# EAGLE board working (EAGLE 7.7.0)
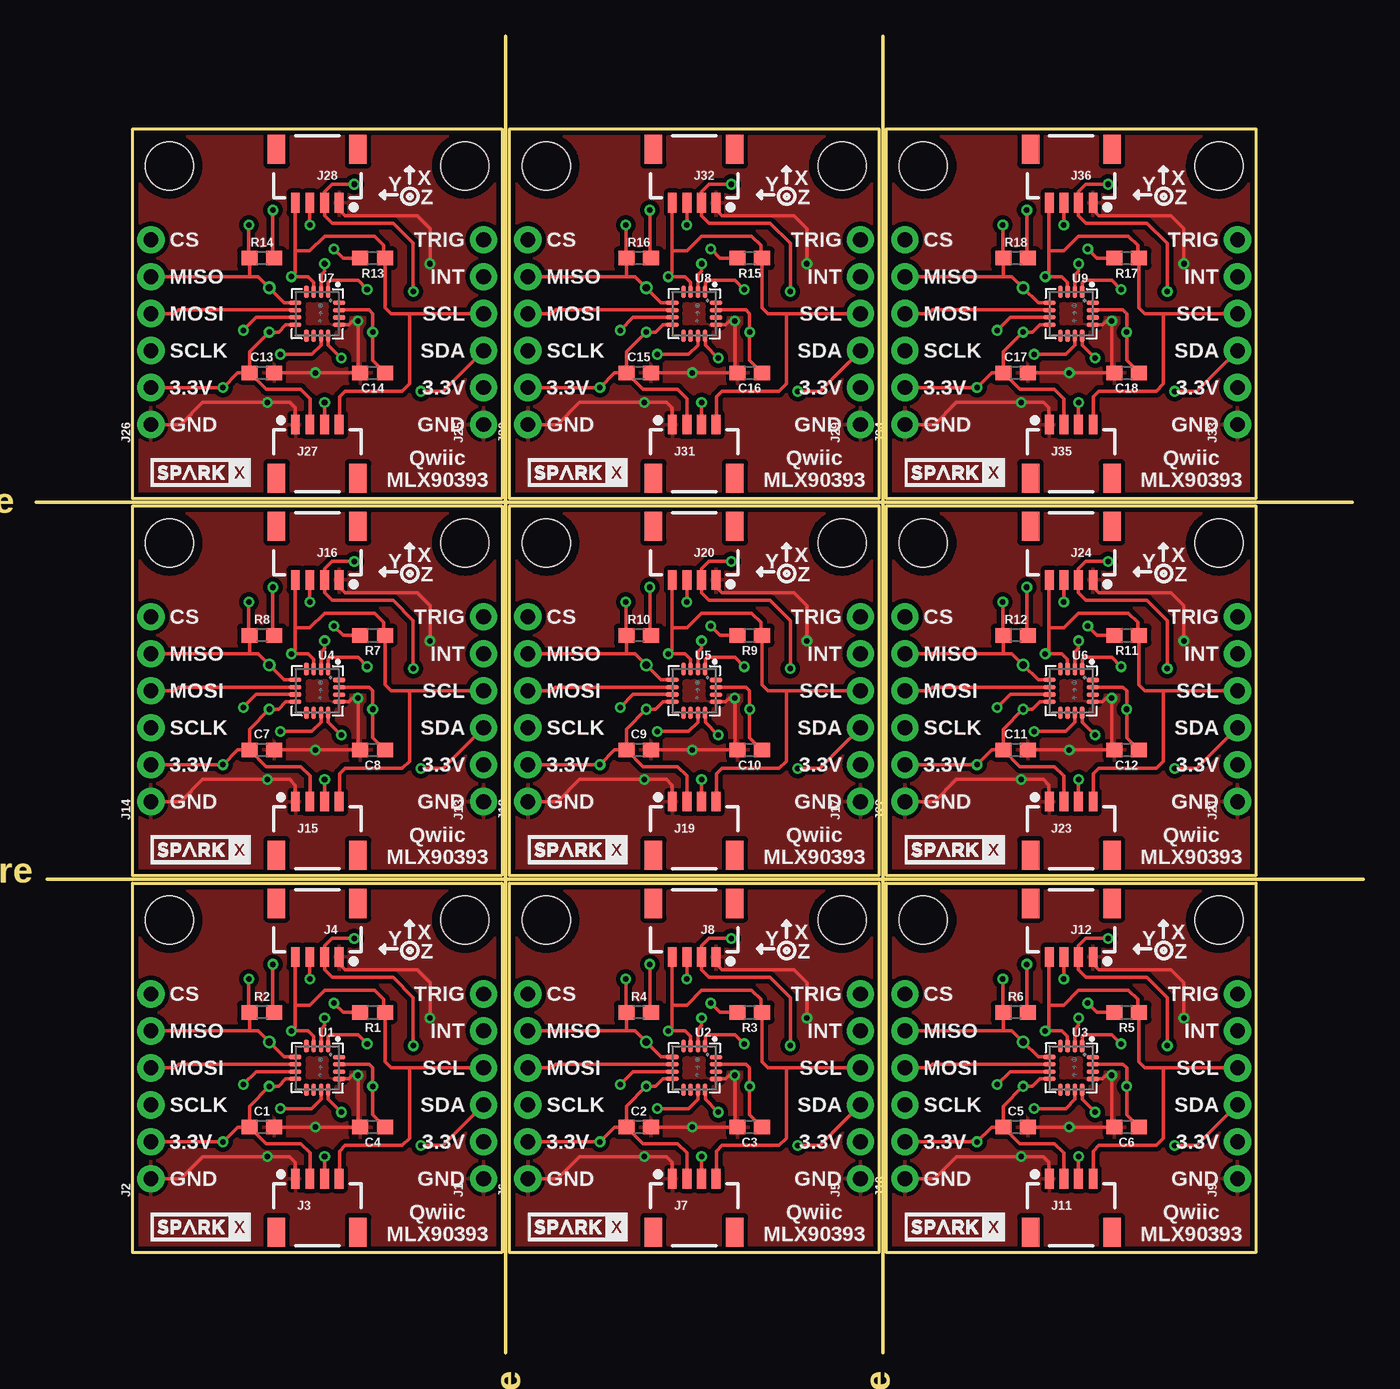
[diagram p0: board, top side]
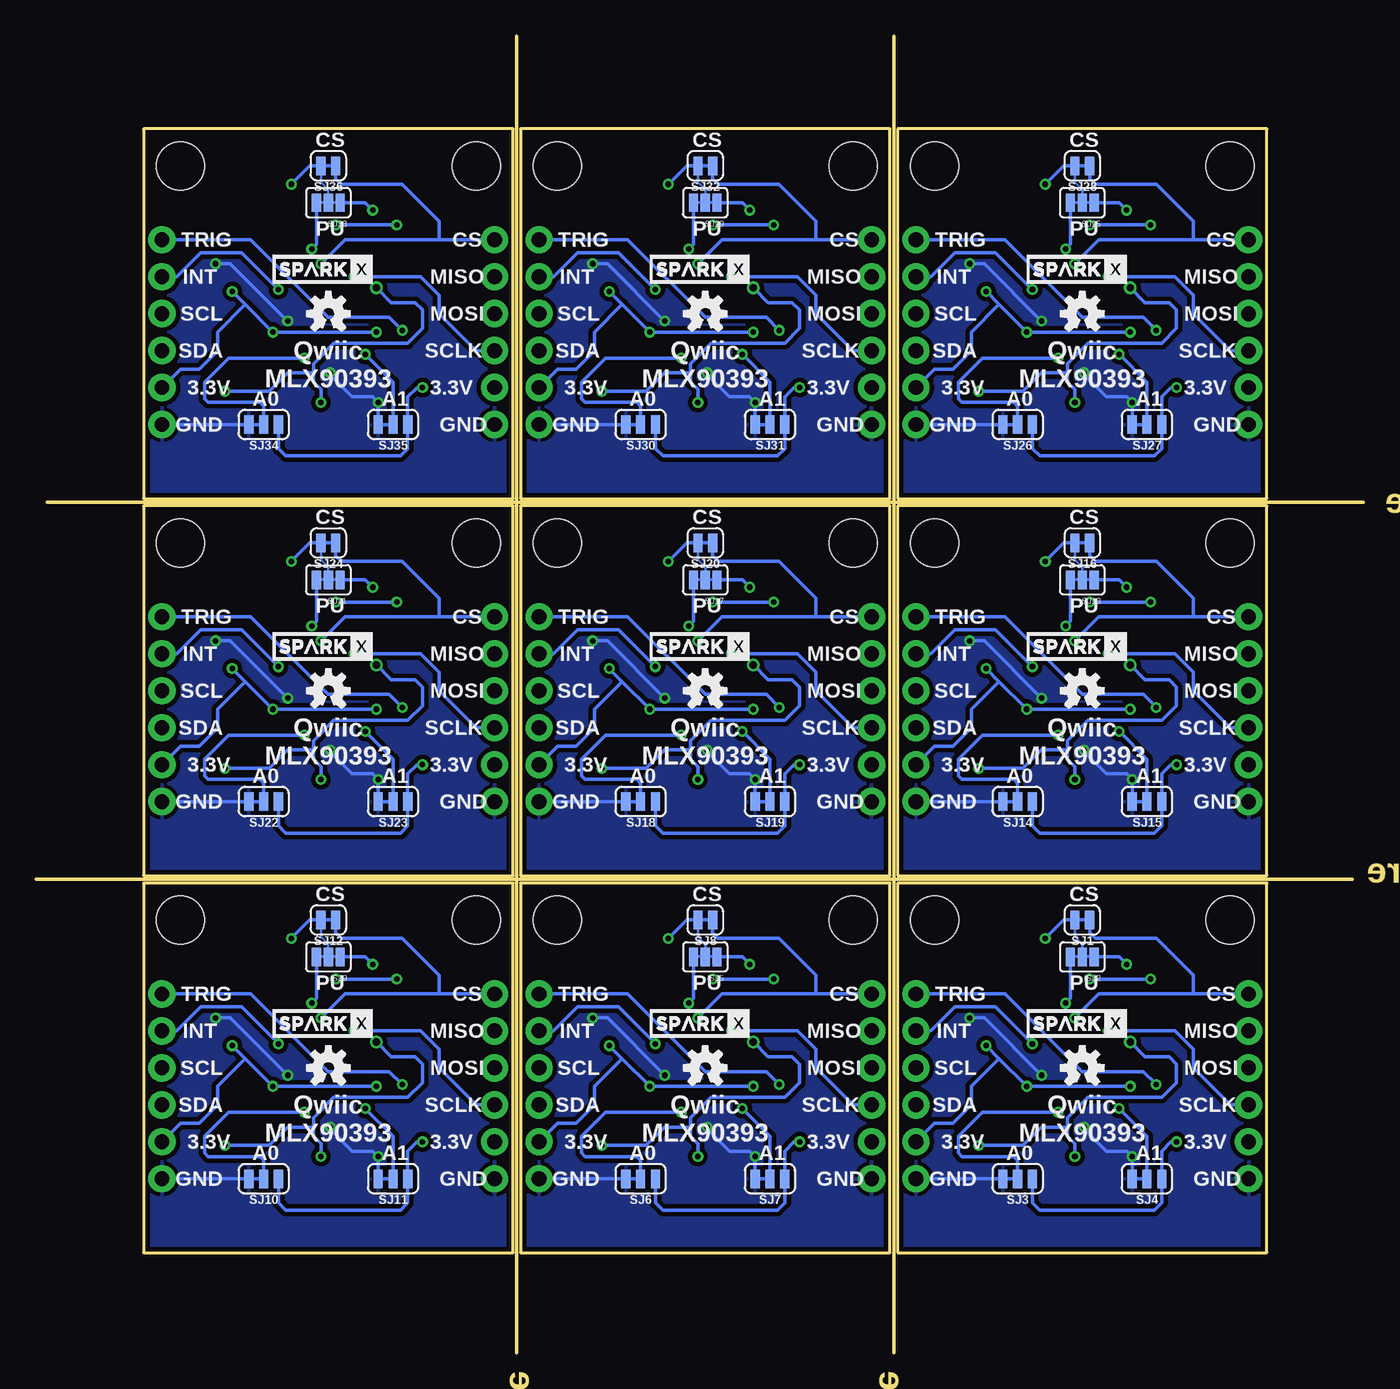
[diagram p1: board, bottom side, seen from below]

Size 91.19 x 90.42 mm. Coordinates in mm from the lower left corner, seen from the top.
Outline: 90.42,58.42 0,58.42
Outline: 91.19,32.51 0.76,32.51
Outline: 32.26,90.42 32.26,0
Outline: 58.17,90.42 58.17,0
Outline: 32,6.86 6.6,6.86 6.6,32.26 32,32.26 32,6.86
Outline: 57.91,6.86 32.51,6.86 32.51,32.26 57.91,32.26 57.91,6.86
Outline: 83.82,6.86 58.42,6.86 58.42,32.26 83.82,32.26 83.82,6.86
Outline: 32,32.77 6.6,32.77 6.6,58.17 32,58.17 32,32.77
Outline: 57.91,32.77 32.51,32.77 32.51,58.17 57.91,58.17 57.91,32.77
Outline: 83.82,32.77 58.42,32.77 58.42,58.17 83.82,58.17 83.82,32.77
Outline: 32,58.67 6.6,58.67 6.6,84.07 32,84.07 32,58.67
Outline: 57.91,58.67 32.51,58.67 32.51,84.07 57.91,84.07 57.91,58.67
Outline: 83.82,58.67 58.42,58.67 58.42,84.07 83.82,84.07 83.82,58.67
Copper layers (1*16): Top 0.035mm / dielectric 1.5mm / Bottom 0.035mm
Design rules "SparkFun-2-layer-TIGHT": minimum track width 7mil, minimum drill 15mil, track to track 7mil, track to pad 7mil, pad to pad 7mil, via to via 7mil, smd to smd 7mil, copper to edge 7mil, drill to drill 7mil, minimum pad ring 7mil, minimum via ring 7mil, stop-mask expansion 4mil, vias tented up to drill 25mil, thermal gap 10mil

## Footprints (pad centres in the part's own frame; a part is rotated, then mirrored left to right if it is on the bottom)
0603 = smd 1.1 x 1: 1 -0.85,0; 2 0.85,0
1X06_NO_SILK = drill 1.016 pad 1.88: 1 0,0; 2 2.54,0; 3 5.08,0; 4 7.62,0; 5 10.16,0; 6 12.7,0
1X04_1MM_RA = smd 0.6 x 1.35: 1 -1.5,0; 2 -0.5,0; 3 0.5,0; 4 1.5,0 | smd 1.2 x 2: NC1 2.8,-3.675; NC2 -2.8,-3.675
STAND-OFF = hole 3.302: 0,0
SMT-JUMPER_2_NC_TRACE_SILK = smd 0.635 x 1.27: 1 -0.508,0; 2 0.508,0
PAD-JUMPER-3-3OF3_NC_BY_TRACE_YES_SILK_FULL_BOX = smd 0.635 x 1.27: 1 -0.813,0; 2 0,0; 3 0.813,0
SMT-JUMPER_3_1-NC_TRACE_SILK = smd 0.635 x 1.27: 1 -1.016,0; 2 0,0; 3 1.016,0
QFN-16 = smd 0.3 x 0.85: 1 0.754,1.498; 2 0.254,1.498; 3 -0.246,1.498; 4 -0.746,1.498; 9 -0.746,-1.506; 10 -0.246,-1.506; 11 0.254,-1.506; 12 0.754,-1.506 | smd 0.85 x 0.3: 5 -1.508,0.746; 6 -1.508,0.246; 7 -1.508,-0.254; 8 -1.508,-0.754; 13 1.496,-0.764; 14 1.496,-0.264; 15 1.496,0.236; 16 1.496,0.736

## Placement (x,y rotation side)
C1  0.1uF  [0603]  15.49,15.49 0 top
C2  0.1uF  [0603]  41.4,15.49 0 top
C3  0.1uF  [0603]  49.02,15.49 180 top
C4  0.1uF  [0603]  23.11,15.49 180 top
C5  0.1uF  [0603]  67.31,15.49 0 top
C6  0.1uF  [0603]  74.93,15.49 180 top
C7  0.1uF  [0603]  15.49,41.4 0 top
C8  0.1uF  [0603]  23.11,41.4 180 top
C9  0.1uF  [0603]  41.4,41.4 0 top
C10  0.1uF  [0603]  49.02,41.4 180 top
C11  0.1uF  [0603]  67.31,41.4 0 top
C12  0.1uF  [0603]  74.93,41.4 180 top
C13  0.1uF  [0603]  15.49,67.31 0 top
C14  0.1uF  [0603]  23.11,67.31 180 top
C15  0.1uF  [0603]  41.4,67.31 0 top
C16  0.1uF  [0603]  49.02,67.31 180 top
C17  0.1uF  [0603]  67.31,67.31 0 top
C18  0.1uF  [0603]  74.93,67.31 180 top
FRAME2  FRAME-LETTER  [CREATIVE_COMMONS]  -11.81,-26.16 0 top  (outside the outline)
J1  [1X06_NO_SILK]  30.73,11.94 90 top
J2  [1X06_NO_SILK]  7.87,11.94 90 top
J3  [1X04_1MM_RA]  19.3,11.94 0 top
J4  [1X04_1MM_RA]  19.3,27.18 180 top
J5  [1X06_NO_SILK]  56.64,11.94 90 top
J6  [1X06_NO_SILK]  33.78,11.94 90 top
J7  [1X04_1MM_RA]  45.21,11.94 0 top
J8  [1X04_1MM_RA]  45.21,27.18 180 top
J9  [1X06_NO_SILK]  82.55,11.94 90 top
J10  [1X06_NO_SILK]  59.69,11.94 90 top
J11  [1X04_1MM_RA]  71.12,11.94 0 top
J12  [1X04_1MM_RA]  71.12,27.18 180 top
J13  [1X06_NO_SILK]  30.73,37.85 90 top
J14  [1X06_NO_SILK]  7.87,37.85 90 top
J15  [1X04_1MM_RA]  19.3,37.85 0 top
J16  [1X04_1MM_RA]  19.3,53.09 180 top
J17  [1X06_NO_SILK]  56.64,37.85 90 top
J18  [1X06_NO_SILK]  33.78,37.85 90 top
J19  [1X04_1MM_RA]  45.21,37.85 0 top
J20  [1X04_1MM_RA]  45.21,53.09 180 top
J21  [1X06_NO_SILK]  82.55,37.85 90 top
J22  [1X06_NO_SILK]  59.69,37.85 90 top
J23  [1X04_1MM_RA]  71.12,37.85 0 top
J24  [1X04_1MM_RA]  71.12,53.09 180 top
J25  [1X06_NO_SILK]  30.73,63.75 90 top
J26  [1X06_NO_SILK]  7.87,63.75 90 top
J27  [1X04_1MM_RA]  19.3,63.75 0 top
J28  [1X04_1MM_RA]  19.3,78.99 180 top
J29  [1X06_NO_SILK]  56.64,63.75 90 top
J30  [1X06_NO_SILK]  33.78,63.75 90 top
J31  [1X04_1MM_RA]  45.21,63.75 0 top
J32  [1X04_1MM_RA]  45.21,78.99 180 top
J33  [1X06_NO_SILK]  82.55,63.75 90 top
J34  [1X06_NO_SILK]  59.69,63.75 90 top
J35  [1X04_1MM_RA]  71.12,63.75 0 top
J36  [1X04_1MM_RA]  71.12,78.99 180 top
JP1  STAND-OFF  [STAND-OFF]  35.05,29.72 0 top
JP2  STAND-OFF  [STAND-OFF]  55.37,29.72 0 top
JP3  STAND-OFF  [STAND-OFF]  9.14,29.72 0 top
JP4  STAND-OFF  [STAND-OFF]  29.46,29.72 0 top
JP5  STAND-OFF  [STAND-OFF]  60.96,29.72 0 top
JP6  STAND-OFF  [STAND-OFF]  81.28,29.72 0 top
JP7  STAND-OFF  [STAND-OFF]  9.14,55.63 0 top
JP8  STAND-OFF  [STAND-OFF]  29.46,55.63 0 top
JP9  STAND-OFF  [STAND-OFF]  35.05,55.63 0 top
JP10  STAND-OFF  [STAND-OFF]  55.37,55.63 0 top
JP11  STAND-OFF  [STAND-OFF]  60.96,55.63 0 top
JP12  STAND-OFF  [STAND-OFF]  81.28,55.63 0 top
JP13  STAND-OFF  [STAND-OFF]  9.14,81.53 0 top
JP14  STAND-OFF  [STAND-OFF]  29.46,81.53 0 top
JP15  STAND-OFF  [STAND-OFF]  35.05,81.53 0 top
JP16  STAND-OFF  [STAND-OFF]  55.37,81.53 0 top
JP17  STAND-OFF  [STAND-OFF]  60.96,81.53 0 top
JP18  STAND-OFF  [STAND-OFF]  81.28,81.53 0 top
R1  10k  [0603]  23.11,23.37 180 top
R2  10k  [0603]  15.49,23.37 0 top
R3  10k  [0603]  49.02,23.37 180 top
R4  10k  [0603]  41.4,23.37 0 top
R5  10k  [0603]  74.93,23.37 180 top
R6  10k  [0603]  67.31,23.37 0 top
R7  10k  [0603]  23.11,49.28 180 top
R8  10k  [0603]  15.49,49.28 0 top
R9  10k  [0603]  49.02,49.28 180 top
R10  10k  [0603]  41.4,49.28 0 top
R11  10k  [0603]  74.93,49.28 180 top
R12  10k  [0603]  67.31,49.28 0 top
R13  10k  [0603]  23.11,75.18 180 top
R14  10k  [0603]  15.49,75.18 0 top
R15  10k  [0603]  49.02,75.18 180 top
R16  10k  [0603]  41.4,75.18 0 top
R17  10k  [0603]  74.93,75.18 180 top
R18  10k  [0603]  67.31,75.18 0 top
SJ1  [SMT-JUMPER_2_NC_TRACE_SILK]  19.3,29.72 180 bottom
SJ2  [PAD-JUMPER-3-3OF3_NC_BY_TRACE_YES_SILK_FULL_BOX]  19.3,27.18 180 bottom
SJ3  [SMT-JUMPER_3_1-NC_TRACE_SILK]  23.75,11.94 180 bottom
SJ4  [SMT-JUMPER_3_1-NC_TRACE_SILK]  14.86,11.94 180 bottom
SJ5  [PAD-JUMPER-3-3OF3_NC_BY_TRACE_YES_SILK_FULL_BOX]  45.21,27.18 180 bottom
SJ6  [SMT-JUMPER_3_1-NC_TRACE_SILK]  49.66,11.94 180 bottom
SJ7  [SMT-JUMPER_3_1-NC_TRACE_SILK]  40.77,11.94 180 bottom
SJ8  [SMT-JUMPER_2_NC_TRACE_SILK]  45.21,29.72 180 bottom
SJ9  [PAD-JUMPER-3-3OF3_NC_BY_TRACE_YES_SILK_FULL_BOX]  71.12,27.18 180 bottom
SJ10  [SMT-JUMPER_3_1-NC_TRACE_SILK]  75.56,11.94 180 bottom
SJ11  [SMT-JUMPER_3_1-NC_TRACE_SILK]  66.67,11.94 180 bottom
SJ12  [SMT-JUMPER_2_NC_TRACE_SILK]  71.12,29.72 180 bottom
SJ13  [PAD-JUMPER-3-3OF3_NC_BY_TRACE_YES_SILK_FULL_BOX]  19.3,53.09 180 bottom
SJ14  [SMT-JUMPER_3_1-NC_TRACE_SILK]  23.75,37.85 180 bottom
SJ15  [SMT-JUMPER_3_1-NC_TRACE_SILK]  14.86,37.85 180 bottom
SJ16  [SMT-JUMPER_2_NC_TRACE_SILK]  19.3,55.63 180 bottom
SJ17  [PAD-JUMPER-3-3OF3_NC_BY_TRACE_YES_SILK_FULL_BOX]  45.21,53.09 180 bottom
SJ18  [SMT-JUMPER_3_1-NC_TRACE_SILK]  49.66,37.85 180 bottom
SJ19  [SMT-JUMPER_3_1-NC_TRACE_SILK]  40.77,37.85 180 bottom
SJ20  [SMT-JUMPER_2_NC_TRACE_SILK]  45.21,55.63 180 bottom
SJ21  [PAD-JUMPER-3-3OF3_NC_BY_TRACE_YES_SILK_FULL_BOX]  71.12,53.09 180 bottom
SJ22  [SMT-JUMPER_3_1-NC_TRACE_SILK]  75.56,37.85 180 bottom
SJ23  [SMT-JUMPER_3_1-NC_TRACE_SILK]  66.67,37.85 180 bottom
SJ24  [SMT-JUMPER_2_NC_TRACE_SILK]  71.12,55.63 180 bottom
SJ25  [PAD-JUMPER-3-3OF3_NC_BY_TRACE_YES_SILK_FULL_BOX]  19.3,78.99 180 bottom
SJ26  [SMT-JUMPER_3_1-NC_TRACE_SILK]  23.75,63.75 180 bottom
SJ27  [SMT-JUMPER_3_1-NC_TRACE_SILK]  14.86,63.75 180 bottom
SJ28  [SMT-JUMPER_2_NC_TRACE_SILK]  19.3,81.53 180 bottom
SJ29  [PAD-JUMPER-3-3OF3_NC_BY_TRACE_YES_SILK_FULL_BOX]  45.21,78.99 180 bottom
SJ30  [SMT-JUMPER_3_1-NC_TRACE_SILK]  49.66,63.75 180 bottom
SJ31  [SMT-JUMPER_3_1-NC_TRACE_SILK]  40.77,63.75 180 bottom
SJ32  [SMT-JUMPER_2_NC_TRACE_SILK]  45.21,81.53 180 bottom
SJ33  [PAD-JUMPER-3-3OF3_NC_BY_TRACE_YES_SILK_FULL_BOX]  71.12,78.99 180 bottom
SJ34  [SMT-JUMPER_3_1-NC_TRACE_SILK]  75.56,63.75 180 bottom
SJ35  [SMT-JUMPER_3_1-NC_TRACE_SILK]  66.67,63.75 180 bottom
SJ36  [SMT-JUMPER_2_NC_TRACE_SILK]  71.12,81.53 180 bottom
U1  MLX90393_MAGNETOMETER  [QFN-16]  19.3,19.56 0 top
U2  MLX90393_MAGNETOMETER  [QFN-16]  45.21,19.56 0 top
U3  MLX90393_MAGNETOMETER  [QFN-16]  71.12,19.56 0 top
U4  MLX90393_MAGNETOMETER  [QFN-16]  19.3,45.47 0 top
U5  MLX90393_MAGNETOMETER  [QFN-16]  45.21,45.47 0 top
U6  MLX90393_MAGNETOMETER  [QFN-16]  71.12,45.47 0 top
U7  MLX90393_MAGNETOMETER  [QFN-16]  19.3,71.37 0 top
U8  MLX90393_MAGNETOMETER  [QFN-16]  45.21,71.37 0 top
U9  MLX90393_MAGNETOMETER  [QFN-16]  71.12,71.37 0 top
U$1  OSHW-LOGOS  [OSHW-LOGO-S]  19.3,19.56 0 bottom
U$2  SPARKX-LOGO3  [SPARKX-SMALL]  11.3,8.64 0 top
U$3  SPARKX-LOGO3  [SPARKX-SMALL]  19.68,22.61 0 bottom
U$4  OSHW-LOGOS  [OSHW-LOGO-S]  45.21,19.56 0 bottom
U$5  SPARKX-LOGO3  [SPARKX-SMALL]  37.21,8.64 0 top
U$6  SPARKX-LOGO3  [SPARKX-SMALL]  45.59,22.61 0 bottom
U$7  OSHW-LOGOS  [OSHW-LOGO-S]  71.12,19.56 0 bottom
U$8  SPARKX-LOGO3  [SPARKX-SMALL]  63.12,8.64 0 top
U$9  SPARKX-LOGO3  [SPARKX-SMALL]  71.5,22.61 0 bottom
U$10  OSHW-LOGOS  [OSHW-LOGO-S]  19.3,45.47 0 bottom
U$11  SPARKX-LOGO3  [SPARKX-SMALL]  11.3,34.54 0 top
U$12  SPARKX-LOGO3  [SPARKX-SMALL]  19.68,48.51 0 bottom
U$13  OSHW-LOGOS  [OSHW-LOGO-S]  45.21,45.47 0 bottom
U$14  SPARKX-LOGO3  [SPARKX-SMALL]  37.21,34.54 0 top
U$15  SPARKX-LOGO3  [SPARKX-SMALL]  45.59,48.51 0 bottom
U$16  OSHW-LOGOS  [OSHW-LOGO-S]  71.12,45.47 0 bottom
U$17  SPARKX-LOGO3  [SPARKX-SMALL]  63.12,34.54 0 top
U$18  SPARKX-LOGO3  [SPARKX-SMALL]  71.5,48.51 0 bottom
U$19  OSHW-LOGOS  [OSHW-LOGO-S]  19.3,71.37 0 bottom
U$20  SPARKX-LOGO3  [SPARKX-SMALL]  11.3,60.45 0 top
U$21  SPARKX-LOGO3  [SPARKX-SMALL]  19.68,74.42 0 bottom
U$22  OSHW-LOGOS  [OSHW-LOGO-S]  45.21,71.37 0 bottom
U$23  SPARKX-LOGO3  [SPARKX-SMALL]  37.21,60.45 0 top
U$24  SPARKX-LOGO3  [SPARKX-SMALL]  45.59,74.42 0 bottom
U$25  OSHW-LOGOS  [OSHW-LOGO-S]  71.12,71.37 0 bottom
U$26  SPARKX-LOGO3  [SPARKX-SMALL]  63.12,60.45 0 top
U$27  SPARKX-LOGO3  [SPARKX-SMALL]  71.5,74.42 0 bottom

## Library data of the parts
C1-C18 = SparkFun-Capacitors; PROD_ID: CAP-00810
FRAME2 = SparkFun-Aesthetics
J1 J2 J5 J6 J9 J10 J13 J14 J17 J18 J21 J22 J25 J26 J29 J30 J33 J34 = SparkFun-Connectors; PROD_ID: CONN-08437
J3 J4 J7 J8 J11 J12 J15 J16 J19 J20 J23 J24 J27 J28 J31 J32 J35 J36 U1-U9 U$2 U$3 U$5 U$6 U$8 U$9 U$11 U$12 U$14 U$15 U$17 U$18 U$20 U$21 U$23 U$24 U$26 U$27 = SparkX
JP1-JP18 U$1 U$4 U$7 U$10 U$13 U$16 U$19 U$22 U$25 = SparkFun
R1-R18 = SparkFun-Resistors; PROD_ID: RES-00824
SJ1 SJ3 SJ4 SJ6-SJ8 SJ10-SJ12 SJ14-SJ16 SJ18-SJ20 SJ22-SJ24 SJ26-SJ28 SJ30-SJ32 SJ34-SJ36 = SparkFun-Jumpers
SJ2 SJ5 SJ9 SJ13 SJ17 SJ21 SJ25 SJ29 SJ33 = TestAperatures

## Nets
3.3V: C1.1 C4.1 J1.2 J2.2 J3.2 J4.2 SJ1.2 SJ2.2 SJ3.1 SJ4.1 U1.8 U1.15
3.3V1: C2.1 C3.1 J5.2 J6.2 J7.2 J8.2 SJ5.2 SJ6.1 SJ7.1 SJ8.2 U2.8 U2.15
3.3V2: C5.1 C6.1 J9.2 J10.2 J11.2 J12.2 SJ9.2 SJ10.1 SJ11.1 SJ12.2 U3.8 U3.15
3.3V3: C7.1 C8.1 J13.2 J14.2 J15.2 J16.2 SJ13.2 SJ14.1 SJ15.1 SJ16.2 U4.8 U4.15
3.3V4: C9.1 C10.1 J17.2 J18.2 J19.2 J20.2 SJ17.2 SJ18.1 SJ19.1 SJ20.2 U5.8 U5.15
3.3V5: C11.1 C12.1 J21.2 J22.2 J23.2 J24.2 SJ21.2 SJ22.1 SJ23.1 SJ24.2 U6.8 U6.15
3.3V6: C13.1 C14.1 J25.2 J26.2 J27.2 J28.2 SJ25.2 SJ26.1 SJ27.1 SJ28.2 U7.8 U7.15
3.3V7: C15.1 C16.1 J29.2 J30.2 J31.2 J32.2 SJ29.2 SJ30.1 SJ31.1 SJ32.2 U8.8 U8.15
3.3V8: C17.1 C18.1 J33.2 J34.2 J35.2 J36.2 SJ33.2 SJ34.1 SJ35.1 SJ36.2 U9.8 U9.15
A0: SJ3.2 U1.12
A1: SJ4.2 U1.11
A2: SJ6.2 U2.12
A3: SJ7.2 U2.11
A4: SJ10.2 U3.12
A5: SJ11.2 U3.11
A6: SJ14.2 U4.12
A7: SJ15.2 U4.11
A8: SJ18.2 U5.12
A9: SJ19.2 U5.11
A10: SJ22.2 U6.12
A11: SJ23.2 U6.11
A12: SJ26.2 U7.12
A13: SJ27.2 U7.11
A14: SJ30.2 U8.12
A15: SJ31.2 U8.11
A16: SJ34.2 U9.12
A17: SJ35.2 U9.11
CS: J2.6 SJ1.1 U1.2
CS1: J6.6 SJ8.1 U2.2
CS2: J10.6 SJ12.1 U3.2
CS3: J14.6 SJ16.1 U4.2
CS4: J18.6 SJ20.1 U5.2
CS5: J22.6 SJ24.1 U6.2
CS6: J26.6 SJ28.1 U7.2
CS7: J30.6 SJ32.1 U8.2
CS8: J34.6 SJ36.1 U9.2
GND: C1.2 C4.2 J1.1 J2.1 J3.1 J4.1 SJ3.3 SJ4.3 U1.13
GND1: C2.2 C3.2 J5.1 J6.1 J7.1 J8.1 SJ6.3 SJ7.3 U2.13
GND2: C5.2 C6.2 J9.1 J10.1 J11.1 J12.1 SJ10.3 SJ11.3 U3.13
GND3: C7.2 C8.2 J13.1 J14.1 J15.1 J16.1 SJ14.3 SJ15.3 U4.13
GND4: C9.2 C10.2 J17.1 J18.1 J19.1 J20.1 SJ18.3 SJ19.3 U5.13
GND5: C11.2 C12.2 J21.1 J22.1 J23.1 J24.1 SJ22.3 SJ23.3 U6.13
GND6: C13.2 C14.2 J25.1 J26.1 J27.1 J28.1 SJ26.3 SJ27.3 U7.13
GND7: C15.2 C16.2 J29.1 J30.1 J31.1 J32.1 SJ30.3 SJ31.3 U8.13
GND8: C17.2 C18.2 J33.1 J34.1 J35.1 J36.1 SJ34.3 SJ35.3 U9.13
INT: J1.5 U1.1
INT1: J5.5 U2.1
INT2: J9.5 U3.1
INT3: J13.5 U4.1
INT4: J17.5 U5.1
INT5: J21.5 U6.1
INT6: J25.5 U7.1
INT7: J29.5 U8.1
INT8: J33.5 U9.1
MISO: J2.4 U1.6
MISO1: J6.4 U2.6
MISO2: J10.4 U3.6
MISO3: J14.4 U4.6
MISO4: J18.4 U5.6
MISO5: J22.4 U6.6
MISO6: J26.4 U7.6
MISO7: J30.4 U8.6
MISO8: J34.4 U9.6
N$1: R4.2 SJ5.1
N$2: R3.2 SJ5.3
N$3: R6.2 SJ9.1
N$4: R2.2 SJ2.1
N$5: R1.2 SJ2.3
N$6: R5.2 SJ9.3
N$7: R8.2 SJ13.1
N$8: R7.2 SJ13.3
N$9: R10.2 SJ17.1
N$10: R9.2 SJ17.3
N$11: R12.2 SJ21.1
N$12: R11.2 SJ21.3
N$13: R14.2 SJ25.1
N$14: R13.2 SJ25.3
N$15: R16.2 SJ29.1
N$16: R15.2 SJ29.3
N$17: R18.2 SJ33.1
N$18: R17.2 SJ33.3
SCL: J1.4 J2.3 J3.4 J4.4 R1.1 U1.3
SCL1: J5.4 J6.3 J7.4 J8.4 R3.1 U2.3
SCL2: J9.4 J10.3 J11.4 J12.4 R5.1 U3.3
SCL3: J13.4 J14.3 J15.4 J16.4 R7.1 U4.3
SCL4: J17.4 J18.3 J19.4 J20.4 R9.1 U5.3
SCL5: J21.4 J22.3 J23.4 J24.4 R11.1 U6.3
SCL6: J25.4 J26.3 J27.4 J28.4 R13.1 U7.3
SCL7: J29.4 J30.3 J31.4 J32.4 R15.1 U8.3
SCL8: J33.4 J34.3 J35.4 J36.4 R17.1 U9.3
SDA: J1.3 J2.5 J3.3 J4.3 R2.1 U1.5
SDA1: J5.3 J6.5 J7.3 J8.3 R4.1 U2.5
SDA2: J9.3 J10.5 J11.3 J12.3 R6.1 U3.5
SDA3: J13.3 J14.5 J15.3 J16.3 R8.1 U4.5
SDA4: J17.3 J18.5 J19.3 J20.3 R10.1 U5.5
SDA5: J21.3 J22.5 J23.3 J24.3 R12.1 U6.5
SDA6: J25.3 J26.5 J27.3 J28.3 R14.1 U7.5
SDA7: J29.3 J30.5 J31.3 J32.3 R16.1 U8.5
SDA8: J33.3 J34.5 J35.3 J36.3 R18.1 U9.5
TRIG: J1.6 U1.7
TRIG1: J5.6 U2.7
TRIG2: J9.6 U3.7
TRIG3: J13.6 U4.7
TRIG4: J17.6 U5.7
TRIG5: J21.6 U6.7
TRIG6: J25.6 U7.7
TRIG7: J29.6 U8.7
TRIG8: J33.6 U9.7

## Tracks (layer width: path | path; a pad name or v marks a point on that pad's centre or on a via)
3.3V  (via drill 0.38)
  Top 0.254: v16,18.29 15.91,18.2 | U1.15 20.82,19.81 22.86,19.81 23.11,19.56 v23.11,18.29 23.11,16.34 C4.1 | v25.91,21.08 25.91,24.38 24.51,25.78 20.32,25.78 19.81,26.29 J4.2 19.8,27.93 20.32,28.45 v21.84,28.45 | U1.8 17.79,18.8 17.14,18.8 16.64,18.29 v16,18.29 | J3.2 18.8,13.71 18.16,14.35 15.79,14.35 C1.1 | J2.2 v12.83,14.48 13.84,15.49 C1.1 | C1.1 14.64,16.93 v16,18.29
  Bottom 0.178: SJ2.2 19.3,28.07 19.81,28.57 SJ1.2
  Bottom 0.254: v16,18.29 v23.11,18.29 25.02,20.19 | J1.2 29.46,15.75 28.19,15.75 26.92,17.02 26.92,18.29 25.02,20.19 | v12.83,14.48 13.21,14.48 13.84,13.84 SJ4.1 13.84,10.29 14.35,9.78 22.23,9.78 22.73,10.29 SJ3.1 | 25.02,20.19 v25.91,21.08 | v21.84,28.45 20.57,29.72 SJ1.2
3.3V1  (via drill 0.38)
  Top 0.254: v41.91,18.29 41.82,18.2 | U2.15 46.73,19.81 48.77,19.81 49.02,19.56 v49.02,18.29 49.02,16.34 C3.1 | v51.82,21.08 51.82,24.38 50.42,25.78 46.23,25.78 45.72,26.29 J8.2 45.71,27.93 46.23,28.45 v47.75,28.45 | U2.8 43.7,18.8 43.05,18.8 42.55,18.29 v41.91,18.29 | J7.2 44.71,13.71 44.07,14.35 41.7,14.35 C2.1 | J6.2 v38.73,14.48 39.75,15.49 C2.1 | C2.1 40.55,16.93 v41.91,18.29
  Bottom 0.178: SJ5.2 45.21,28.07 45.72,28.57 SJ8.2
  Bottom 0.254: v41.91,18.29 v49.02,18.29 50.93,20.19 | J5.2 55.37,15.75 54.1,15.75 52.83,17.02 52.83,18.29 50.93,20.19 | v38.73,14.48 39.12,14.48 39.75,13.84 SJ7.1 39.75,10.29 40.26,9.78 48.13,9.78 48.64,10.29 SJ6.1 | 50.93,20.19 v51.82,21.08 | v47.75,28.45 46.48,29.72 SJ8.2
3.3V2  (via drill 0.38)
  Top 0.254: v67.82,18.29 67.73,18.2 | U3.15 72.63,19.81 74.68,19.81 74.93,19.56 v74.93,18.29 74.93,16.34 C6.1 | v77.72,21.08 77.72,24.38 76.33,25.78 72.14,25.78 71.63,26.29 J12.2 71.62,27.93 72.14,28.45 v73.66,28.45 | U3.8 69.6,18.8 68.96,18.8 68.45,18.29 v67.82,18.29 | 70.61,11.95 J11.2 70.62,13.71 69.98,14.35 67.6,14.35 C5.1 | J10.2 v64.64,14.48 65.66,15.49 C5.1 | C5.1 66.46,16.93 v67.82,18.29
  Bottom 0.178: SJ9.2 71.12,28.07 71.63,28.57 SJ12.2
  Bottom 0.254: v67.82,18.29 v74.93,18.29 76.83,20.19 | J9.2 81.28,15.75 80.01,15.75 78.74,17.02 78.74,18.29 76.83,20.19 | v64.64,14.48 65.02,14.48 65.66,13.84 SJ11.1 65.66,10.29 66.17,9.78 74.04,9.78 74.55,10.29 SJ10.1 | 76.83,20.19 v77.72,21.08 | v73.66,28.45 72.39,29.72 SJ12.2
3.3V3  (via drill 0.38)
  Top 0.254: v16,44.2 15.91,44.11 | U4.15 20.82,45.72 22.86,45.72 23.11,45.47 v23.11,44.2 23.11,42.25 C8.1 | v25.91,46.99 25.91,50.29 24.51,51.69 20.32,51.69 19.81,52.2 J16.2 19.8,53.84 20.32,54.36 v21.84,54.36 | U4.8 17.14,44.7 16.64,44.2 v16,44.2 | J15.2 18.8,39.62 18.16,40.26 15.79,40.26 C7.1 | J14.2 v12.83,40.39 13.84,41.4 C7.1 | C7.1 14.64,42.84 v16,44.2
  Bottom 0.178: SJ13.2 19.3,53.97 19.81,54.48 SJ16.2
  Bottom 0.254: v16,44.2 v23.11,44.2 25.02,46.1 | J13.2 29.46,41.66 28.19,41.66 26.92,42.93 26.92,44.2 25.02,46.1 | v12.83,40.39 13.21,40.39 13.84,39.75 SJ15.1 13.84,36.2 14.35,35.69 22.23,35.69 22.73,36.2 SJ14.1 | 25.02,46.1 v25.91,46.99 | v21.84,54.36 20.57,55.63 SJ16.2
3.3V4  (via drill 0.38)
  Top 0.254: v41.91,44.2 41.82,44.11 | U5.15 46.73,45.72 48.77,45.72 49.02,45.47 v49.02,44.2 49.02,42.25 C10.1 | v51.82,46.99 51.82,50.29 50.42,51.69 46.23,51.69 45.72,52.2 J20.2 45.71,53.84 46.23,54.36 v47.75,54.36 | U5.8 43.05,44.7 42.55,44.2 v41.91,44.2 | J19.2 44.71,39.62 44.07,40.26 41.7,40.26 C9.1 | J18.2 v38.73,40.39 39.75,41.4 C9.1 | C9.1 40.55,42.84 v41.91,44.2
  Bottom 0.178: SJ17.2 45.21,53.97 45.72,54.48 SJ20.2
  Bottom 0.254: v41.91,44.2 v49.02,44.2 50.93,46.1 | J17.2 55.37,41.66 54.1,41.66 52.83,42.93 52.83,44.2 50.93,46.1 | v38.73,40.39 39.12,40.39 39.75,39.75 SJ19.1 39.75,36.2 40.26,35.69 48.13,35.69 48.64,36.2 SJ18.1 | 50.93,46.1 v51.82,46.99 | v47.75,54.36 46.48,55.63 SJ20.2
3.3V5  (via drill 0.38)
  Top 0.254: v67.82,44.2 67.73,44.11 | U6.15 72.63,45.72 74.68,45.72 74.93,45.47 v74.93,44.2 74.93,42.25 C12.1 | v77.72,46.99 77.72,50.29 76.33,51.69 72.14,51.69 71.63,52.2 J24.2 71.62,53.84 72.14,54.36 v73.66,54.36 | U6.8 68.96,44.7 68.45,44.2 v67.82,44.2 | 70.61,37.85 J23.2 70.62,39.62 69.98,40.26 67.6,40.26 C11.1 | J22.2 v64.64,40.39 65.66,41.4 C11.1 | C11.1 66.46,42.84 v67.82,44.2
  Bottom 0.178: SJ21.2 71.12,53.97 71.63,54.48 SJ24.2
  Bottom 0.254: v67.82,44.2 v74.93,44.2 76.83,46.1 | J21.2 81.28,41.66 80.01,41.66 78.74,42.93 78.74,44.2 76.83,46.1 | v64.64,40.39 65.02,40.39 65.66,39.75 SJ23.1 65.66,36.2 66.17,35.69 74.04,35.69 74.55,36.2 SJ22.1 | 76.83,46.1 v77.72,46.99 | v73.66,54.36 72.39,55.63 SJ24.2
3.3V6  (via drill 0.38)
  Top 0.254: v16,70.1 15.91,70.02 | U7.15 20.82,71.63 22.86,71.63 23.11,71.37 v23.11,70.1 23.11,68.16 C14.1 | v25.91,72.9 25.91,76.2 24.51,77.6 20.32,77.6 19.81,78.11 19.81,78.99 J28.2 19.8,79.75 20.32,80.26 v21.84,80.26 | U7.8 17.14,70.61 16.64,70.1 v16,70.1 | J27.2 18.8,65.52 18.16,66.17 15.79,66.17 C13.1 | J26.2 v12.83,66.29 13.84,67.31 C13.1 | C13.1 14.64,68.75 v16,70.1
  Bottom 0.178: SJ25.2 19.3,79.88 19.81,80.39 SJ28.2
  Bottom 0.254: v16,70.1 v23.11,70.1 25.02,72.01 | J25.2 29.46,67.56 28.19,67.56 26.92,68.83 26.92,70.1 25.02,72.01 | v12.83,66.29 13.21,66.29 13.84,65.66 SJ27.1 13.84,62.1 14.35,61.59 22.23,61.59 22.73,62.1 SJ26.1 | 25.02,72.01 v25.91,72.9 | v21.84,80.26 20.57,81.53 SJ28.2
3.3V7  (via drill 0.38)
  Top 0.254: v41.91,70.1 41.82,70.02 | U8.15 46.73,71.63 48.77,71.63 49.02,71.37 v49.02,70.1 49.02,68.16 C16.1 | v51.82,72.9 51.82,76.2 50.42,77.6 46.23,77.6 45.72,78.11 45.72,78.99 J32.2 45.71,79.75 46.23,80.26 v47.75,80.26 | U8.8 43.05,70.61 42.55,70.1 v41.91,70.1 | J31.2 44.71,65.52 44.07,66.17 41.7,66.17 C15.1 | J30.2 v38.73,66.29 39.75,67.31 C15.1 | C15.1 40.55,68.75 v41.91,70.1
  Bottom 0.178: SJ29.2 45.21,79.88 45.72,80.39 SJ32.2
  Bottom 0.254: v41.91,70.1 v49.02,70.1 50.93,72.01 | J29.2 55.37,67.56 54.1,67.56 52.83,68.83 52.83,70.1 50.93,72.01 | v38.73,66.29 39.12,66.29 39.75,65.66 SJ31.1 39.75,62.1 40.26,61.59 48.13,61.59 48.64,62.1 SJ30.1 | 50.93,72.01 v51.82,72.9 | v47.75,80.26 46.48,81.53 SJ32.2
3.3V8  (via drill 0.38)
  Top 0.254: v67.82,70.1 67.73,70.02 | U9.15 72.63,71.63 74.68,71.63 74.93,71.37 v74.93,70.1 74.93,68.16 C18.1 | v77.72,72.9 77.72,76.2 76.33,77.6 72.14,77.6 71.63,78.11 71.63,78.99 J36.2 71.62,79.75 72.14,80.26 v73.66,80.26 | U9.8 68.96,70.61 68.45,70.1 v67.82,70.1 | 70.61,63.76 J35.2 70.62,65.52 69.98,66.17 67.6,66.17 C17.1 | J34.2 v64.64,66.29 65.66,67.31 C17.1 | C17.1 66.46,68.75 v67.82,70.1
  Bottom 0.178: SJ33.2 71.12,79.88 71.63,80.39 SJ36.2
  Bottom 0.254: v67.82,70.1 v74.93,70.1 76.83,72.01 | J33.2 81.28,67.56 80.01,67.56 78.74,68.83 78.74,70.1 76.83,72.01 | v64.64,66.29 65.02,66.29 65.66,65.66 SJ35.1 65.66,62.1 66.17,61.59 74.04,61.59 74.55,62.1 SJ34.1 | 76.83,72.01 v77.72,72.9 | v73.66,80.26 72.39,81.53 SJ36.2
A0  (via drill 0.38)
  Top 0.254: U1.12 20.07,18.04 20.07,17.4 v20.96,16.51
  Bottom 0.254: v20.96,16.51 26.16,16.51 27.81,14.86 27.81,13.72 27.56,13.46 24,13.46 23.75,13.21 SJ3.2
A1  (via drill 0.38)
  Top 0.254: U1.11 19.56,17.4 18.92,16.76 v16.76,16.76
  Bottom 0.254: v16.76,16.76 14.86,14.86 SJ4.2
A2  (via drill 0.38)
  Top 0.254: U2.12 45.97,17.4 v46.86,16.51
  Bottom 0.254: v46.86,16.51 52.07,16.51 53.72,14.86 53.72,13.72 53.47,13.46 49.91,13.46 49.66,13.21 SJ6.2
A3  (via drill 0.38)
  Top 0.254: U2.11 45.47,17.4 44.83,16.76 v42.67,16.76
  Bottom 0.254: v42.67,16.76 40.77,14.86 SJ7.2
A4  (via drill 0.38)
  Top 0.254: U3.12 71.88,17.4 v72.77,16.51
  Bottom 0.254: v72.77,16.51 77.98,16.51 79.63,14.86 79.63,13.72 79.38,13.46 75.82,13.46 75.56,13.21 SJ10.2
A5  (via drill 0.38)
  Top 0.254: U3.11 71.37,17.4 70.74,16.76 v68.58,16.76
  Bottom 0.254: v68.58,16.76 66.67,14.86 SJ11.2
A6  (via drill 0.38)
  Top 0.254: U4.12 20.07,43.95 20.07,43.31 v20.96,42.42
  Bottom 0.254: v20.96,42.42 26.16,42.42 27.81,40.77 27.81,39.62 27.56,39.37 24,39.37 23.75,39.12 SJ14.2
A7  (via drill 0.38)
  Top 0.254: U4.11 19.56,43.31 18.92,42.67 v16.76,42.67
  Bottom 0.254: v16.76,42.67 14.86,40.77 SJ15.2
A8  (via drill 0.38)
  Top 0.254: U5.12 45.97,43.31 v46.86,42.42
  Bottom 0.254: v46.86,42.42 52.07,42.42 53.72,40.77 53.72,39.62 53.47,39.37 49.91,39.37 49.66,39.12 SJ18.2
A9  (via drill 0.38)
  Top 0.254: U5.11 45.47,43.31 44.83,42.67 v42.67,42.67
  Bottom 0.254: v42.67,42.67 40.77,40.77 SJ19.2
A10  (via drill 0.38)
  Top 0.254: U6.12 71.88,43.31 v72.77,42.42
  Bottom 0.254: v72.77,42.42 77.98,42.42 79.63,40.77 79.63,39.62 79.38,39.37 75.82,39.37 75.56,39.12 SJ22.2
A11  (via drill 0.38)
  Top 0.254: U6.11 71.37,43.31 70.74,42.67 v68.58,42.67
  Bottom 0.254: v68.58,42.67 66.67,40.77 SJ23.2
A12  (via drill 0.38)
  Top 0.254: U7.12 20.07,69.86 20.07,69.22 v20.96,68.33
  Bottom 0.254: v20.96,68.33 26.16,68.33 27.81,66.67 27.81,65.53 27.56,65.28 24,65.28 23.75,65.02 SJ26.2
A13  (via drill 0.38)
  Top 0.254: U7.11 19.56,69.22 18.92,68.58 v16.76,68.58
  Bottom 0.254: v16.76,68.58 14.86,66.67 SJ27.2
A14  (via drill 0.38)
  Top 0.254: U8.12 45.97,69.22 v46.86,68.33
  Bottom 0.254: v46.86,68.33 52.07,68.33 53.72,66.67 53.72,65.53 53.47,65.28 49.91,65.28 49.66,65.02 SJ30.2
A15  (via drill 0.38)
  Top 0.254: U8.11 45.47,69.22 44.83,68.58 v42.67,68.58
  Bottom 0.254: v42.67,68.58 40.77,66.67 SJ31.2
A16  (via drill 0.38)
  Top 0.254: U9.12 71.88,69.22 v72.77,68.33
  Bottom 0.254: v72.77,68.33 77.98,68.33 79.63,66.67 79.63,65.53 79.38,65.28 75.82,65.28 75.56,65.02 SJ34.2
A17  (via drill 0.38)
  Top 0.254: U9.11 71.37,69.22 70.74,68.58 v68.58,68.58
  Bottom 0.254: v68.58,68.58 66.67,66.67 SJ35.2
CS  (via drill 0.38)
  Top 0.254: U1.2 19.56,22.23 19.81,22.48 v19.81,22.99
  Bottom 0.254: v19.81,22.99 18.16,24.64 11.68,24.64 | 11.68,24.64 J2.6 | 11.68,24.64 11.68,25.91 14.22,28.45 18.41,28.45 18.8,28.83 SJ1.1
CS1  (via drill 0.38)
  Top 0.254: U2.2 45.47,22.23 45.72,22.48 v45.72,22.99
  Bottom 0.254: v45.72,22.99 44.07,24.64 37.59,24.64 | 37.59,24.64 J6.6 | 37.59,24.64 37.59,25.91 40.13,28.45 44.32,28.45 44.7,28.83 SJ8.1
CS2  (via drill 0.38)
  Top 0.254: U3.2 71.37,22.23 71.63,22.48 v71.63,22.99
  Bottom 0.254: v71.63,22.99 69.98,24.64 63.5,24.64 | 63.5,24.64 J10.6 | 63.5,24.64 63.5,25.91 66.04,28.45 70.23,28.45 70.61,28.83 SJ12.1
CS3  (via drill 0.38)
  Top 0.254: U4.2 19.56,48.13 19.81,48.39 v19.81,48.89
  Bottom 0.254: v19.81,48.89 18.16,50.55 11.68,50.55 | 11.68,50.55 J14.6 | 11.68,50.55 11.68,51.82 14.22,54.36 18.41,54.36 18.8,54.74 SJ16.1
CS4  (via drill 0.38)
  Top 0.254: U5.2 45.47,48.13 45.72,48.39 v45.72,48.89
  Bottom 0.254: v45.72,48.89 44.07,50.55 37.59,50.55 | 37.59,50.55 J18.6 | 37.59,50.55 37.59,51.82 40.13,54.36 44.32,54.36 44.7,54.74 SJ20.1
CS5  (via drill 0.38)
  Top 0.254: U6.2 71.37,48.13 71.63,48.39 v71.63,48.89
  Bottom 0.254: v71.63,48.89 69.98,50.55 63.5,50.55 | 63.5,50.55 J22.6 | 63.5,50.55 63.5,51.82 66.04,54.36 70.23,54.36 70.61,54.74 SJ24.1
CS6  (via drill 0.38)
  Top 0.254: U7.2 19.56,74.04 19.81,74.3 v19.81,74.8
  Bottom 0.254: v19.81,74.8 18.16,76.45 11.68,76.45 | 11.68,76.45 J26.6 | 11.68,76.45 11.68,77.72 14.22,80.26 18.41,80.26 18.8,80.65 SJ28.1
CS7  (via drill 0.38)
  Top 0.254: U8.2 45.47,74.04 45.72,74.3 v45.72,74.8
  Bottom 0.254: v45.72,74.8 44.07,76.45 37.59,76.45 | 37.59,76.45 J30.6 | 37.59,76.45 37.59,77.72 40.13,80.26 44.32,80.26 44.7,80.65 SJ32.1
CS8  (via drill 0.38)
  Top 0.254: U9.2 71.37,74.04 71.63,74.3 v71.63,74.8
  Bottom 0.254: v71.63,74.8 69.98,76.45 63.5,76.45 | 63.5,76.45 J34.6 | 63.5,76.45 63.5,77.72 66.04,80.26 70.23,80.26 70.61,80.65 SJ36.1
GND  (via drill 0.38)
  Top 0.254: J2.1 9.91,11.94 11.43,13.46 v15.88,13.46 17.4,13.46 17.78,13.08 17.78,11.96 J3.1 | C4.2 v19.18,15.49 C1.2 | U1.13 21.46,18.8 21.72,19.05 v22.1,19.05 22.1,15.45 | v27.05,22.99 27.05,25.4 26.16,26.29 21.21,26.29 20.8,26.69 J4.1
  Bottom 0.254: SJ3.3 24.89,11.94 | 24.89,11.94 J1.1 | SJ4.3 v15.88,13.46 16.26,13.84 17.65,13.84 19.18,15.37 v19.18,15.49 | v22.1,19.05 26.04,22.99 v27.05,22.99 | 24.89,11.94 24.77,11.81 | 7.87,11.3 J2.1
  pour Top (isolate 0.305): 6.6,32.26 6.6,6.86 32,6.86 32,32.26
  pour Bottom (isolate 0.305): 6.6,32.26 6.6,6.86 32,6.86 32,32.26
GND1  (via drill 0.38)
  Top 0.254: J6.1 35.81,11.94 37.34,13.46 v41.78,13.46 43.31,13.46 43.69,13.08 43.69,11.96 J7.1 | C3.2 v45.09,15.49 C2.2 | U2.13 47.37,18.8 47.62,19.05 v48.01,19.05 48.01,15.45 | v52.96,22.99 52.96,25.4 52.07,26.29 47.12,26.29 46.71,26.69 J8.1
  Bottom 0.254: SJ6.3 50.8,11.94 | 50.8,11.94 J5.1 | SJ7.3 v41.78,13.46 42.16,13.84 43.56,13.84 45.09,15.37 v45.09,15.49 | v48.01,19.05 51.94,22.99 v52.96,22.99 | 50.8,11.94 50.67,11.81 | 33.78,11.3 J6.1
  pour Top (isolate 0.305): 32.51,32.26 32.51,6.86 57.91,6.86 57.91,32.26
  pour Bottom (isolate 0.305): 32.51,32.26 32.51,6.86 57.91,6.86 57.91,32.26
GND2  (via drill 0.38)
  Top 0.254: J10.1 61.72,11.94 63.25,13.46 v67.69,13.46 69.22,13.46 69.6,13.08 69.6,11.96 J11.1 | C6.2 v70.99,15.49 C5.2 | U3.13 73.28,18.8 73.53,19.05 v73.91,19.05 73.91,15.45 | v78.87,22.99 78.87,25.4 77.98,26.29 73.03,26.29 72.62,26.69 J12.1
  Bottom 0.254: SJ10.3 76.71,11.94 | 76.71,11.94 J9.1 | SJ11.3 v67.69,13.46 68.07,13.84 69.47,13.84 70.99,15.37 v70.99,15.49 | v73.91,19.05 77.85,22.99 v78.87,22.99 | 76.71,11.94 76.58,11.81 | 59.69,11.3 J10.1
  pour Top (isolate 0.305): 58.42,32.26 58.42,6.86 83.82,6.86 83.82,32.26
  pour Bottom (isolate 0.305): 58.42,32.26 58.42,6.86 83.82,6.86 83.82,32.26
GND3  (via drill 0.38)
  Top 0.254: J14.1 9.91,37.85 11.43,39.37 v15.88,39.37 17.4,39.37 17.78,38.99 17.78,37.87 J15.1 | C8.2 v19.18,41.4 C7.2 | U4.13 21.46,44.7 21.72,44.96 v22.1,44.96 22.1,41.36 | v27.05,48.89 27.05,51.31 26.16,52.2 21.21,52.2 20.8,52.6 J16.1
  Bottom 0.254: SJ14.3 24.89,37.85 | 24.89,37.85 J13.1 | SJ15.3 v15.88,39.37 16.26,39.75 17.65,39.75 19.18,41.27 v19.18,41.4 | v22.1,44.96 26.04,48.89 v27.05,48.89 | 24.89,37.85 24.77,37.72 | 7.87,37.21 J14.1
  pour Top (isolate 0.305): 6.6,58.17 6.6,32.77 32,32.77 32,58.17
  pour Bottom (isolate 0.305): 6.6,58.17 6.6,32.77 32,32.77 32,58.17
GND4  (via drill 0.38)
  Top 0.254: J18.1 35.81,37.85 37.34,39.37 v41.78,39.37 43.31,39.37 43.69,38.99 43.69,37.87 J19.1 | C10.2 v45.09,41.4 C9.2 | U5.13 47.37,44.7 47.62,44.96 v48.01,44.96 48.01,41.36 | v52.96,48.89 52.96,51.31 52.07,52.2 47.12,52.2 46.71,52.6 J20.1
  Bottom 0.254: SJ18.3 50.8,37.85 | 50.8,37.85 J17.1 | SJ19.3 v41.78,39.37 42.16,39.75 43.56,39.75 45.09,41.27 v45.09,41.4 | v48.01,44.96 51.94,48.89 v52.96,48.89 | 50.8,37.85 50.67,37.72 | 33.78,37.21 J18.1
  pour Top (isolate 0.305): 32.51,58.17 32.51,32.77 57.91,32.77 57.91,58.17
  pour Bottom (isolate 0.305): 32.51,58.17 32.51,32.77 57.91,32.77 57.91,58.17
GND5  (via drill 0.38)
  Top 0.254: J22.1 61.72,37.85 63.25,39.37 v67.69,39.37 69.22,39.37 69.6,38.99 69.6,37.87 J23.1 | C12.2 v70.99,41.4 C11.2 | U6.13 73.28,44.7 73.53,44.96 v73.91,44.96 73.91,41.36 | v78.87,48.89 78.87,51.31 77.98,52.2 73.03,52.2 72.62,52.6 J24.1
  Bottom 0.254: SJ22.3 76.71,37.85 | 76.71,37.85 J21.1 | SJ23.3 v67.69,39.37 68.07,39.75 69.47,39.75 70.99,41.27 v70.99,41.4 | v73.91,44.96 77.85,48.89 v78.87,48.89 | 76.71,37.85 76.58,37.72 | 59.69,37.21 J22.1
  pour Top (isolate 0.305): 58.42,58.17 58.42,32.77 83.82,32.77 83.82,58.17
  pour Bottom (isolate 0.305): 58.42,58.17 58.42,32.77 83.82,32.77 83.82,58.17
GND6  (via drill 0.38)
  Top 0.254: J26.1 9.91,63.75 11.43,65.28 v15.88,65.28 17.4,65.28 17.78,64.9 17.78,63.78 J27.1 | C14.2 v19.18,67.31 C13.2 | U7.13 21.46,70.61 21.72,70.87 v22.1,70.87 22.1,67.27 | v27.05,74.8 27.05,77.22 26.16,78.11 21.21,78.11 20.8,78.51 J28.1
  Bottom 0.254: SJ26.3 24.89,63.75 | 24.89,63.75 J25.1 | SJ27.3 v15.88,65.28 16.26,65.66 17.65,65.66 19.18,67.18 v19.18,67.31 | v22.1,70.87 26.04,74.8 v27.05,74.8 | 24.89,63.75 24.77,63.63 | 7.87,63.12 J26.1
  pour Top (isolate 0.305): 6.6,84.07 6.6,58.67 32,58.67 32,84.07
  pour Bottom (isolate 0.305): 6.6,84.07 6.6,58.67 32,58.67 32,84.07
GND7  (via drill 0.38)
  Top 0.254: J30.1 35.81,63.75 37.34,65.28 v41.78,65.28 43.31,65.28 43.69,64.9 43.69,63.78 J31.1 | C16.2 v45.09,67.31 C15.2 | U8.13 47.37,70.61 47.62,70.87 v48.01,70.87 48.01,67.27 | v52.96,74.8 52.96,77.22 52.07,78.11 47.12,78.11 46.71,78.51 J32.1
  Bottom 0.254: SJ30.3 50.8,63.75 | 50.8,63.75 J29.1 | SJ31.3 v41.78,65.28 42.16,65.66 43.56,65.66 45.09,67.18 v45.09,67.31 | v48.01,70.87 51.94,74.8 v52.96,74.8 | 50.8,63.75 50.67,63.63 | 33.78,63.12 J30.1
  pour Top (isolate 0.305): 32.51,84.07 32.51,58.67 57.91,58.67 57.91,84.07
  pour Bottom (isolate 0.305): 32.51,84.07 32.51,58.67 57.91,58.67 57.91,84.07
GND8  (via drill 0.38)
  Top 0.254: J34.1 61.72,63.75 63.25,65.28 v67.69,65.28 69.22,65.28 69.6,64.9 69.6,63.78 J35.1 | C18.2 v70.99,67.31 C17.2 | U9.13 73.28,70.61 73.53,70.87 v73.91,70.87 73.91,67.27 | v78.87,74.8 78.87,77.22 77.98,78.11 73.03,78.11 72.62,78.51 J36.1
  Bottom 0.254: SJ34.3 76.71,63.75 | 76.71,63.75 J33.1 | SJ35.3 v67.69,65.28 68.07,65.66 69.47,65.66 70.99,67.18 v70.99,67.31 | v73.91,70.87 77.85,74.8 v78.87,74.8 | 76.71,63.75 76.58,63.63 | 59.69,63.12 J34.1
  pour Top (isolate 0.305): 58.42,84.07 58.42,58.67 83.82,58.67 83.82,84.07
  pour Bottom (isolate 0.305): 58.42,84.07 58.42,58.67 83.82,58.67 83.82,84.07
INT  (via drill 0.38)
  Top 0.254: U1.1 20.07,21.06 20.07,21.72 20.19,21.84 22.1,21.84 v22.73,21.21
  Bottom 0.254: v22.73,21.21 25.27,23.75 28.07,23.75 29.72,22.1 J1.5
INT1  (via drill 0.38)
  Top 0.254: U2.1 45.97,21.72 46.1,21.84 48.01,21.84 v48.64,21.21
  Bottom 0.254: v48.64,21.21 51.18,23.75 53.98,23.75 55.63,22.1 J5.5
INT2  (via drill 0.38)
  Top 0.254: U3.1 71.88,21.72 72.01,21.84 73.91,21.84 v74.55,21.21
  Bottom 0.254: v74.55,21.21 77.09,23.75 79.88,23.75 81.53,22.1 J9.5
INT3  (via drill 0.38)
  Top 0.254: U4.1 20.07,46.97 20.07,47.62 20.19,47.75 22.1,47.75 v22.73,47.12
  Bottom 0.254: v22.73,47.12 25.27,49.66 28.07,49.66 29.72,48.01 J13.5
INT4  (via drill 0.38)
  Top 0.254: U5.1 45.97,47.62 46.1,47.75 48.01,47.75 v48.64,47.12
  Bottom 0.254: v48.64,47.12 51.18,49.66 53.98,49.66 55.63,48.01 J17.5
INT5  (via drill 0.38)
  Top 0.254: U6.1 71.88,47.62 72.01,47.75 73.91,47.75 v74.55,47.12
  Bottom 0.254: v74.55,47.12 77.09,49.66 79.88,49.66 81.53,48.01 J21.5
INT6  (via drill 0.38)
  Top 0.254: U7.1 20.07,72.88 20.07,73.53 20.19,73.66 22.1,73.66 v22.73,73.03
  Bottom 0.254: v22.73,73.03 25.27,75.56 28.07,75.56 29.72,73.91 J25.5
INT7  (via drill 0.38)
  Top 0.254: U8.1 45.97,72.88 45.97,73.53 46.1,73.66 48.01,73.66 v48.64,73.03
  Bottom 0.254: v48.64,73.03 51.18,75.56 53.98,75.56 55.63,73.91 J29.5
INT8  (via drill 0.38)
  Top 0.254: U9.1 71.88,72.88 71.88,73.53 72.01,73.66 73.91,73.66 v74.55,73.03
  Bottom 0.254: v74.55,73.03 77.09,75.56 79.88,75.56 81.53,73.91 J33.5
MISO
  Top 0.254: U1.6 9.78,19.81 9.53,19.56 J2.4
MISO1
  Top 0.254: U2.6 35.69,19.81 35.43,19.56 J6.4
MISO2
  Top 0.254: U3.6 61.59,19.81 61.34,19.56 J10.4
MISO3
  Top 0.254: U4.6 17.79,45.72 9.78,45.72 9.53,45.47 J14.4
MISO4
  Top 0.254: U5.6 43.7,45.72 35.69,45.72 35.43,45.47 J18.4
MISO5
  Top 0.254: U6.6 69.6,45.72 61.59,45.72 61.34,45.47 J22.4
MISO6
  Top 0.254: U7.6 9.78,71.63 9.53,71.37 J26.4
MISO7
  Top 0.254: U8.6 35.69,71.63 35.43,71.37 J30.4
MISO8
  Top 0.254: U9.6 61.59,71.63 61.34,71.37 J34.4
N$1  (via drill 0.38)
  Top 0.254: R4.2 42.16,23.46 v42.16,26.67
  Bottom 0.254: SJ5.1 42.67,27.18 v42.16,26.67
N$2  (via drill 0.38)
  Top 0.254: v46.35,24 46.99,23.37 R3.2
  Bottom 0.254: SJ5.3 46.02,24.33 v46.35,24
N$3  (via drill 0.38)
  Top 0.254: R6.2 68.07,23.46 v68.07,26.67
  Bottom 0.254: SJ9.1 68.58,27.18 v68.07,26.67
N$4  (via drill 0.38)
  Top 0.254: R2.2 16.26,23.46 v16.26,26.67
  Bottom 0.254: SJ2.1 16.76,27.18 v16.26,26.67
N$5  (via drill 0.38)
  Top 0.254: v20.45,24 21.08,23.37 R1.2
  Bottom 0.254: SJ2.3 20.12,24.33 v20.45,24
N$6  (via drill 0.38)
  Top 0.254: v72.26,24 72.9,23.37 R5.2
  Bottom 0.254: SJ9.3 71.93,24.33 v72.26,24
N$7  (via drill 0.38)
  Top 0.254: R8.2 16.26,49.36 v16.26,52.58
  Bottom 0.254: SJ13.1 16.76,53.09 v16.26,52.58
N$8  (via drill 0.38)
  Top 0.254: v20.45,49.91 21.08,49.28 R7.2
  Bottom 0.254: SJ13.3 20.12,50.24 v20.45,49.91
N$9  (via drill 0.38)
  Top 0.254: R10.2 42.16,49.36 v42.16,52.58
  Bottom 0.254: SJ17.1 42.67,53.09 v42.16,52.58
N$10  (via drill 0.38)
  Top 0.254: v46.35,49.91 46.99,49.28 R9.2
  Bottom 0.254: SJ17.3 46.02,50.24 v46.35,49.91
N$11  (via drill 0.38)
  Top 0.254: R12.2 68.07,49.36 v68.07,52.58
  Bottom 0.254: SJ21.1 68.58,53.09 v68.07,52.58
N$12  (via drill 0.38)
  Top 0.254: v72.26,49.91 72.9,49.28 R11.2
  Bottom 0.254: SJ21.3 71.93,50.24 v72.26,49.91
N$13  (via drill 0.38)
  Top 0.254: R14.2 16.26,75.27 v16.26,78.49
  Bottom 0.254: SJ25.1 16.76,78.99 v16.26,78.49
N$14  (via drill 0.38)
  Top 0.254: v20.45,75.82 21.08,75.18 R13.2
  Bottom 0.254: SJ25.3 20.12,76.15 v20.45,75.82
N$15  (via drill 0.38)
  Top 0.254: R16.2 42.16,75.27 v42.16,78.49
  Bottom 0.254: SJ29.1 42.67,78.99 v42.16,78.49
N$16  (via drill 0.38)
  Top 0.254: v46.35,75.82 46.99,75.18 R15.2
  Bottom 0.254: SJ29.3 46.02,76.15 v46.35,75.82
N$17  (via drill 0.38)
  Top 0.254: R18.2 68.07,75.27 v68.07,78.49
  Bottom 0.254: SJ33.1 68.58,78.99 v68.07,78.49
N$18  (via drill 0.38)
  Top 0.254: v72.26,75.82 72.9,75.18 R17.2
  Bottom 0.254: SJ33.3 71.93,76.15 v72.26,75.82
SCL  (via drill 0.38)
  Top 0.254: J3.4 20.83,11.96 20.83,13.84 21.21,14.22 25.15,14.22 25.65,14.73 25.65,19.56 | 25.65,19.56 24.38,19.56 23.96,19.98 R1.1 23.88,23.46 23.88,24.26 23.24,24.89 19.81,24.89 18.8,23.88 17.78,23.88 | 25.65,19.56 J1.4 | J4.4 17.78,27.15 17.78,23.88 | U1.3 19.05,21.72 18.67,22.1 v17.53,22.1 17.78,22.35 17.78,23.88
  Bottom 0.254: v17.53,22.1 12.95,22.1 11.68,20.83 11.68,19.56 9.14,17.02 J2.3
SCL1  (via drill 0.38)
  Top 0.254: J7.4 46.74,11.96 46.74,13.84 47.12,14.22 51.05,14.22 51.56,14.73 51.56,19.56 | 51.56,19.56 50.29,19.56 49.87,19.98 R3.1 49.78,23.46 49.78,24.26 49.15,24.89 45.72,24.89 44.7,23.88 43.69,23.88 | 51.56,19.56 J5.4 | J8.4 43.69,27.15 43.69,23.88 | U2.3 44.96,21.72 44.58,22.1 v43.43,22.1 43.69,22.35 43.69,23.88
  Bottom 0.254: v43.43,22.1 38.86,22.1 37.59,20.83 37.59,19.56 35.05,17.02 J6.3
SCL2  (via drill 0.38)
  Top 0.254: J11.4 72.64,11.96 72.64,13.84 73.03,14.22 76.96,14.22 77.47,14.73 77.47,19.56 | 77.47,19.56 76.2,19.56 75.78,19.98 R5.1 75.69,23.46 75.69,24.26 75.06,24.89 71.63,24.89 70.61,23.88 69.6,23.88 | 77.47,19.56 J9.4 | J12.4 69.6,27.15 69.6,23.88 | U3.3 70.87,21.72 70.48,22.1 v69.34,22.1 69.6,22.35 69.6,23.88
  Bottom 0.254: v69.34,22.1 64.77,22.1 63.5,20.83 63.5,19.56 60.96,17.02 J10.3
SCL3  (via drill 0.38)
  Top 0.254: J15.4 20.83,37.87 20.83,39.75 21.21,40.13 25.15,40.13 25.65,40.64 25.65,45.47 | 25.65,45.47 24.38,45.47 23.96,45.89 R7.1 23.88,49.36 23.88,50.16 23.24,50.8 19.81,50.8 18.8,49.78 17.78,49.78 | 25.65,45.47 J13.4 | J16.4 17.78,53.06 17.78,49.78 | U4.3 19.05,47.62 18.67,48.01 v17.53,48.01 17.78,48.26 17.78,49.78
  Bottom 0.254: v17.53,48.01 12.95,48.01 11.68,46.74 11.68,45.47 9.14,42.93 J14.3
SCL4  (via drill 0.38)
  Top 0.254: J19.4 46.74,37.87 46.74,39.75 47.12,40.13 51.05,40.13 51.56,40.64 51.56,45.47 | 51.56,45.47 50.29,45.47 49.87,45.89 R9.1 49.78,49.36 49.78,50.16 49.15,50.8 45.72,50.8 44.7,49.78 43.69,49.78 | 51.56,45.47 J17.4 | J20.4 43.69,53.06 43.69,49.78 | U5.3 44.96,47.62 44.58,48.01 v43.43,48.01 43.69,48.26 43.69,49.78
  Bottom 0.254: v43.43,48.01 38.86,48.01 37.59,46.74 37.59,45.47 35.05,42.93 J18.3
SCL5  (via drill 0.38)
  Top 0.254: J23.4 72.64,37.87 72.64,39.75 73.03,40.13 76.96,40.13 77.47,40.64 77.47,45.47 | 77.47,45.47 76.2,45.47 75.78,45.89 R11.1 75.69,49.36 75.69,50.16 75.06,50.8 71.63,50.8 70.61,49.78 69.6,49.78 | 77.47,45.47 J21.4 | J24.4 69.6,53.06 69.6,49.78 | U6.3 70.87,47.62 70.48,48.01 v69.34,48.01 69.6,48.26 69.6,49.78
  Bottom 0.254: v69.34,48.01 64.77,48.01 63.5,46.74 63.5,45.47 60.96,42.93 J22.3
SCL6  (via drill 0.38)
  Top 0.254: J27.4 20.83,63.78 20.83,65.66 21.21,66.04 25.15,66.04 25.65,66.55 25.65,71.37 | 25.65,71.37 24.38,71.37 23.96,71.79 R13.1 23.88,75.27 23.88,76.07 23.24,76.71 19.81,76.71 18.8,75.69 17.78,75.69 | 25.65,71.37 J25.4 | J28.4 17.78,78.97 17.78,75.69 | U7.3 19.05,72.88 19.05,73.53 18.67,73.91 v17.53,73.91 17.78,74.17 17.78,75.69
  Bottom 0.254: v17.53,73.91 12.95,73.91 11.68,72.64 11.68,71.37 9.14,68.83 J26.3
SCL7  (via drill 0.38)
  Top 0.254: J31.4 46.74,63.78 46.74,65.66 47.12,66.04 51.05,66.04 51.56,66.55 51.56,71.37 | 51.56,71.37 50.29,71.37 49.87,71.79 R15.1 49.78,75.27 49.78,76.07 49.15,76.71 45.72,76.71 44.7,75.69 43.69,75.69 | 51.56,71.37 J29.4 | J32.4 43.69,78.97 43.69,75.69 | U8.3 44.96,72.88 44.96,73.53 44.58,73.91 v43.43,73.91 43.69,74.17 43.69,75.69
  Bottom 0.254: v43.43,73.91 38.86,73.91 37.59,72.64 37.59,71.37 35.05,68.83 J30.3
SCL8  (via drill 0.38)
  Top 0.254: J35.4 72.64,63.78 72.64,65.66 73.03,66.04 76.96,66.04 77.47,66.55 77.47,71.37 | 77.47,71.37 76.2,71.37 75.78,71.79 R17.1 75.69,75.27 75.69,76.07 75.06,76.71 71.63,76.71 70.61,75.69 69.6,75.69 | 77.47,71.37 J33.4 | J36.4 69.6,78.97 69.6,75.69 | U9.3 70.87,72.88 70.87,73.53 70.48,73.91 v69.34,73.91 69.6,74.17 69.6,75.69
  Bottom 0.254: v69.34,73.91 64.77,73.91 63.5,72.64 63.5,71.37 60.96,68.83 J34.3
SDA  (via drill 0.38, 0.51)
  Top 0.254: 14.64,22.1 R2.1 14.61,23.41 v14.61,25.65 | J4.3 v18.8,25.65 | J2.5 14.64,22.1 | J3.3 v19.81,13.46 | J1.3 27.94,14.22 v26.42,14.22 | U1.5 17.03,20.3 v16,21.34 15.24,22.1 14.64,22.1
  Bottom 0.254: v14.61,25.65 v18.8,25.65 | v19.81,13.46 19.81,14.35 20.32,14.86 20.32,15.49 | 20.32,15.49 20.32,16.13 18.92,17.53 13.84,17.53 12.83,18.54 12.83,19.81 13.34,20.32 14.99,20.32 v16,21.34 | v26.42,14.22 23.37,14.22 22.1,15.49 20.32,15.49
SDA1  (via drill 0.38, 0.51)
  Top 0.254: 40.55,22.1 R4.1 40.51,23.41 v40.51,25.65 | J8.3 v44.7,25.65 | J6.5 40.55,22.1 | J7.3 v45.72,13.46 | J5.3 53.85,14.22 v52.32,14.22 | U2.5 42.94,20.3 v41.91,21.34 41.15,22.1 40.55,22.1
  Bottom 0.254: v40.51,25.65 v44.7,25.65 | v45.72,13.46 45.72,14.35 46.23,14.86 46.23,15.49 | 46.23,15.49 46.23,16.13 44.83,17.53 39.75,17.53 38.73,18.54 38.73,19.81 39.24,20.32 40.89,20.32 v41.91,21.34 | v52.32,14.22 49.28,14.22 48.01,15.49 46.23,15.49
SDA2  (via drill 0.38, 0.51)
  Top 0.254: 66.46,22.1 R6.1 66.42,23.41 v66.42,25.65 | J12.3 70.61,27.17 v70.61,25.65 | J10.5 66.46,22.1 | J11.3 v71.63,13.46 | J9.3 79.76,14.22 v78.23,14.22 | U3.5 68.85,20.3 v67.82,21.34 67.06,22.1 66.46,22.1
  Bottom 0.254: v66.42,25.65 v70.61,25.65 | v71.63,13.46 71.63,14.35 72.14,14.86 72.14,15.49 | 72.14,15.49 72.14,16.13 70.74,17.53 65.66,17.53 64.64,18.54 64.64,19.81 65.15,20.32 66.8,20.32 v67.82,21.34 | v78.23,14.22 75.18,14.22 73.91,15.49 72.14,15.49
SDA3  (via drill 0.38, 0.51)
  Top 0.254: 14.64,48.01 R8.1 14.61,49.31 v14.61,51.56 | J16.3 v18.8,51.56 | J14.5 14.64,48.01 | J15.3 v19.81,39.37 | J13.3 27.94,40.13 v26.42,40.13 | U4.5 17.03,46.21 v16,47.24 15.24,48.01 14.64,48.01
  Bottom 0.254: v14.61,51.56 v18.8,51.56 | v19.81,39.37 19.81,40.26 20.32,40.77 20.32,41.4 | 20.32,41.4 20.32,42.04 18.92,43.43 13.84,43.43 12.83,44.45 12.83,45.72 13.34,46.23 14.99,46.23 v16,47.24 | v26.42,40.13 23.37,40.13 22.1,41.4 20.32,41.4
SDA4  (via drill 0.38, 0.51)
  Top 0.254: 40.55,48.01 R10.1 40.51,49.31 v40.51,51.56 | J20.3 v44.7,51.56 | J18.5 40.55,48.01 | J19.3 v45.72,39.37 | J17.3 53.85,40.13 v52.32,40.13 | U5.5 42.94,46.21 v41.91,47.24 41.15,48.01 40.55,48.01
  Bottom 0.254: v40.51,51.56 v44.7,51.56 | v45.72,39.37 45.72,40.26 46.23,40.77 46.23,41.4 | 46.23,41.4 46.23,42.04 44.83,43.43 39.75,43.43 38.73,44.45 38.73,45.72 39.24,46.23 40.89,46.23 v41.91,47.24 | v52.32,40.13 49.28,40.13 48.01,41.4 46.23,41.4
SDA5  (via drill 0.38, 0.51)
  Top 0.254: 66.46,48.01 R12.1 66.42,49.31 v66.42,51.56 | J24.3 70.61,53.08 v70.61,51.56 | J22.5 66.46,48.01 | J23.3 v71.63,39.37 | J21.3 79.76,40.13 v78.23,40.13 | U6.5 68.85,46.21 v67.82,47.24 67.06,48.01 66.46,48.01
  Bottom 0.254: v66.42,51.56 v70.61,51.56 | v71.63,39.37 71.63,40.26 72.14,40.77 72.14,41.4 | 72.14,41.4 72.14,42.04 70.74,43.43 65.66,43.43 64.64,44.45 64.64,45.72 65.15,46.23 66.8,46.23 v67.82,47.24 | v78.23,40.13 75.18,40.13 73.91,41.4 72.14,41.4
SDA6  (via drill 0.38, 0.51)
  Top 0.254: 14.64,73.91 R14.1 14.61,75.22 v14.61,77.47 | J28.3 18.8,78.99 v18.8,77.47 | J26.5 14.64,73.91 | J27.3 v19.81,65.28 | J25.3 27.94,66.04 v26.42,66.04 | U7.5 17.03,72.12 v16,73.15 15.24,73.91 14.64,73.91
  Bottom 0.254: v14.61,77.47 v18.8,77.47 | v19.81,65.28 19.81,66.17 20.32,66.67 20.32,67.31 | 20.32,67.31 20.32,67.95 18.92,69.34 13.84,69.34 12.83,70.36 12.83,71.63 13.34,72.14 14.99,72.14 v16,73.15 | v26.42,66.04 23.37,66.04 22.1,67.31 20.32,67.31
SDA7  (via drill 0.38, 0.51)
  Top 0.254: 40.55,73.91 R16.1 40.51,75.22 v40.51,77.47 | J32.3 44.7,78.99 v44.7,77.47 | J30.5 40.55,73.91 | J31.3 v45.72,65.28 | J29.3 53.85,66.04 v52.32,66.04 | U8.5 42.94,72.12 v41.91,73.15 41.15,73.91 40.55,73.91
  Bottom 0.254: v40.51,77.47 v44.7,77.47 | v45.72,65.28 45.72,66.17 46.23,66.67 46.23,67.31 | 46.23,67.31 46.23,67.95 44.83,69.34 39.75,69.34 38.73,70.36 38.73,71.63 39.24,72.14 40.89,72.14 v41.91,73.15 | v52.32,66.04 49.28,66.04 48.01,67.31 46.23,67.31
SDA8  (via drill 0.38, 0.51)
  Top 0.254: 66.46,73.91 R18.1 66.42,75.22 v66.42,77.47 | J36.3 70.61,78.99 v70.61,77.47 | J34.5 66.46,73.91 | J35.3 v71.63,65.28 | J33.3 79.76,66.04 v78.23,66.04 | U9.5 68.85,72.12 v67.82,73.15 67.06,73.91 66.46,73.91
  Bottom 0.254: v66.42,77.47 v70.61,77.47 | v71.63,65.28 71.63,66.17 72.14,66.67 72.14,67.31 | 72.14,67.31 72.14,67.95 70.74,69.34 65.66,69.34 64.64,70.36 64.64,71.63 65.15,72.14 66.8,72.14 v67.82,73.15 | v78.23,66.04 75.18,66.04 73.91,67.31 72.14,67.31
TRIG  (via drill 0.38)
  Top 0.254: U1.7 15.11,19.3 v14.22,18.41
  Bottom 0.254: J1.6 24.64,24.64 19.3,19.3 15.11,19.3 v14.22,18.41
TRIG1  (via drill 0.38)
  Top 0.254: U2.7 41.02,19.3 v40.13,18.41
  Bottom 0.254: J5.6 50.55,24.64 45.21,19.3 41.02,19.3 v40.13,18.41
TRIG2  (via drill 0.38)
  Top 0.254: U3.7 66.93,19.3 v66.04,18.41
  Bottom 0.254: J9.6 76.45,24.64 71.12,19.3 66.93,19.3 v66.04,18.41
TRIG3  (via drill 0.38)
  Top 0.254: U4.7 15.11,45.21 v14.22,44.32
  Bottom 0.254: J13.6 24.64,50.55 19.3,45.21 15.11,45.21 v14.22,44.32
TRIG4  (via drill 0.38)
  Top 0.254: U5.7 41.02,45.21 v40.13,44.32
  Bottom 0.254: J17.6 50.55,50.55 45.21,45.21 41.02,45.21 v40.13,44.32
TRIG5  (via drill 0.38)
  Top 0.254: U6.7 66.93,45.21 v66.04,44.32
  Bottom 0.254: J21.6 76.45,50.55 71.12,45.21 66.93,45.21 v66.04,44.32
TRIG6  (via drill 0.38)
  Top 0.254: U7.7 15.11,71.12 v14.22,70.23
  Bottom 0.254: J25.6 24.64,76.45 19.3,71.12 15.11,71.12 v14.22,70.23
TRIG7  (via drill 0.38)
  Top 0.254: U8.7 41.02,71.12 v40.13,70.23
  Bottom 0.254: J29.6 50.55,76.45 45.21,71.12 41.02,71.12 v40.13,70.23
TRIG8  (via drill 0.38)
  Top 0.254: U9.7 66.93,71.12 v66.04,70.23
  Bottom 0.254: J33.6 76.45,76.45 71.12,71.12 66.93,71.12 v66.04,70.23

## Text on the board
Dimension: Vscore | Vscore | Vscore | Vscore
tPlace: Y | X | Y | X | Y | X | Z | Z | Z | CS | TRIG | CS | TRIG | CS | TRIG | MISO | INT | MISO | INT | MISO | INT | MOSI | SCL | MOSI | SCL | MOSI | SCL | SCLK | SDA | SCLK | SDA | SCLK | SDA | 3.3V | 3.3V | 3.3V | 3.3V | 3.3V | 3.3V | GND | GND | GND | GND | GND | GND | Qwiic / MLX90393 | Qwiic / MLX90393 | Qwiic / MLX90393 | Y | X | Y | X | Y | X | Z | Z | Z | CS | TRIG | CS | TRIG | CS | TRIG | MISO | INT | MISO | INT | MISO | INT | MOSI | SCL | MOSI | SCL | MOSI | SCL | SCLK | SDA | SCLK | SDA | SCLK | SDA | 3.3V | 3.3V | 3.3V | 3.3V | 3.3V | 3.3V | GND | GND | GND | GND | GND | GND | Qwiic / MLX90393 | Qwiic / MLX90393 | Qwiic / MLX90393 | X | X | X | Y | Y | Y | Z | Z | Z | CS | TRIG | CS | TRIG | CS | TRIG | MISO | INT | MISO | INT | MISO | INT | MOSI | SCL | MOSI | SCL | MOSI | SCL | SCLK | SDA | SCLK | SDA | SCLK | SDA | 3.3V | 3.3V | 3.3V | 3.3V | 3.3V | 3.3V | GND | GND | GND | GND | GND | GND | Qwiic / MLX90393 | Qwiic / MLX90393 | Qwiic / MLX90393
bPlace: CS | CS | CS | PU | PU | PU | CS | TRIG | CS | TRIG | CS | TRIG | MISO | INT | MISO | INT | MISO | INT | MOSI | SCL | MOSI | SCL | MOSI | SCL | SCLK | SDA | SCLK | SDA | SCLK | SDA | 3.3V | A1 | Qwiic / MLX90393 | A0 | 3.3V | 3.3V | A1 | Qwiic / MLX90393 | A0 | 3.3V | 3.3V | A1 | Qwiic / MLX90393 | A0 | 3.3V | GND | GND | GND | GND | GND | GND | CS | CS | CS | PU | PU | PU | CS | TRIG | CS | TRIG | CS | TRIG | MISO | INT | MISO | INT | MISO | INT | MOSI | SCL | MOSI | SCL | MOSI | SCL | SCLK | SDA | SCLK | SDA | SCLK | SDA | Qwiic / MLX90393 | Qwiic / MLX90393 | Qwiic / MLX90393 | 3.3V | A1 | A0 | 3.3V | 3.3V | A1 | A0 | 3.3V | 3.3V | A1 | A0 | 3.3V | GND | GND | GND | GND | GND | GND | CS | CS | CS | PU | PU | PU | CS | TRIG | CS | TRIG | CS | TRIG | MISO | INT | MISO | INT | MISO | INT | MOSI | SCL | MOSI | SCL | MOSI | SCL | SCLK | SDA | SCLK | SDA | SCLK | SDA | Qwiic / MLX90393 | Qwiic / MLX90393 | Qwiic / MLX90393 | 3.3V | A1 | A0 | 3.3V | 3.3V | A1 | A0 | 3.3V | 3.3V | A1 | A0 | 3.3V | GND | GND | GND | GND | GND | GND
tDocu: R. Reynolds